# Altium PCB NetworkModule.PcbDoc (part 2 of 3)
Units mm, origin at the board's own origin, x right, y up, seen from the top; angles counter-clockwise.
Board outline 20 x 35 mm, 6 copper layers (Top, GND, Inner3, Inner4, PWR, Bottom), stack 0.74 mm thick; 111 components, 126 nets, 545 pads, 464 vias.
Unrouted connection lines stored in the file: 214.
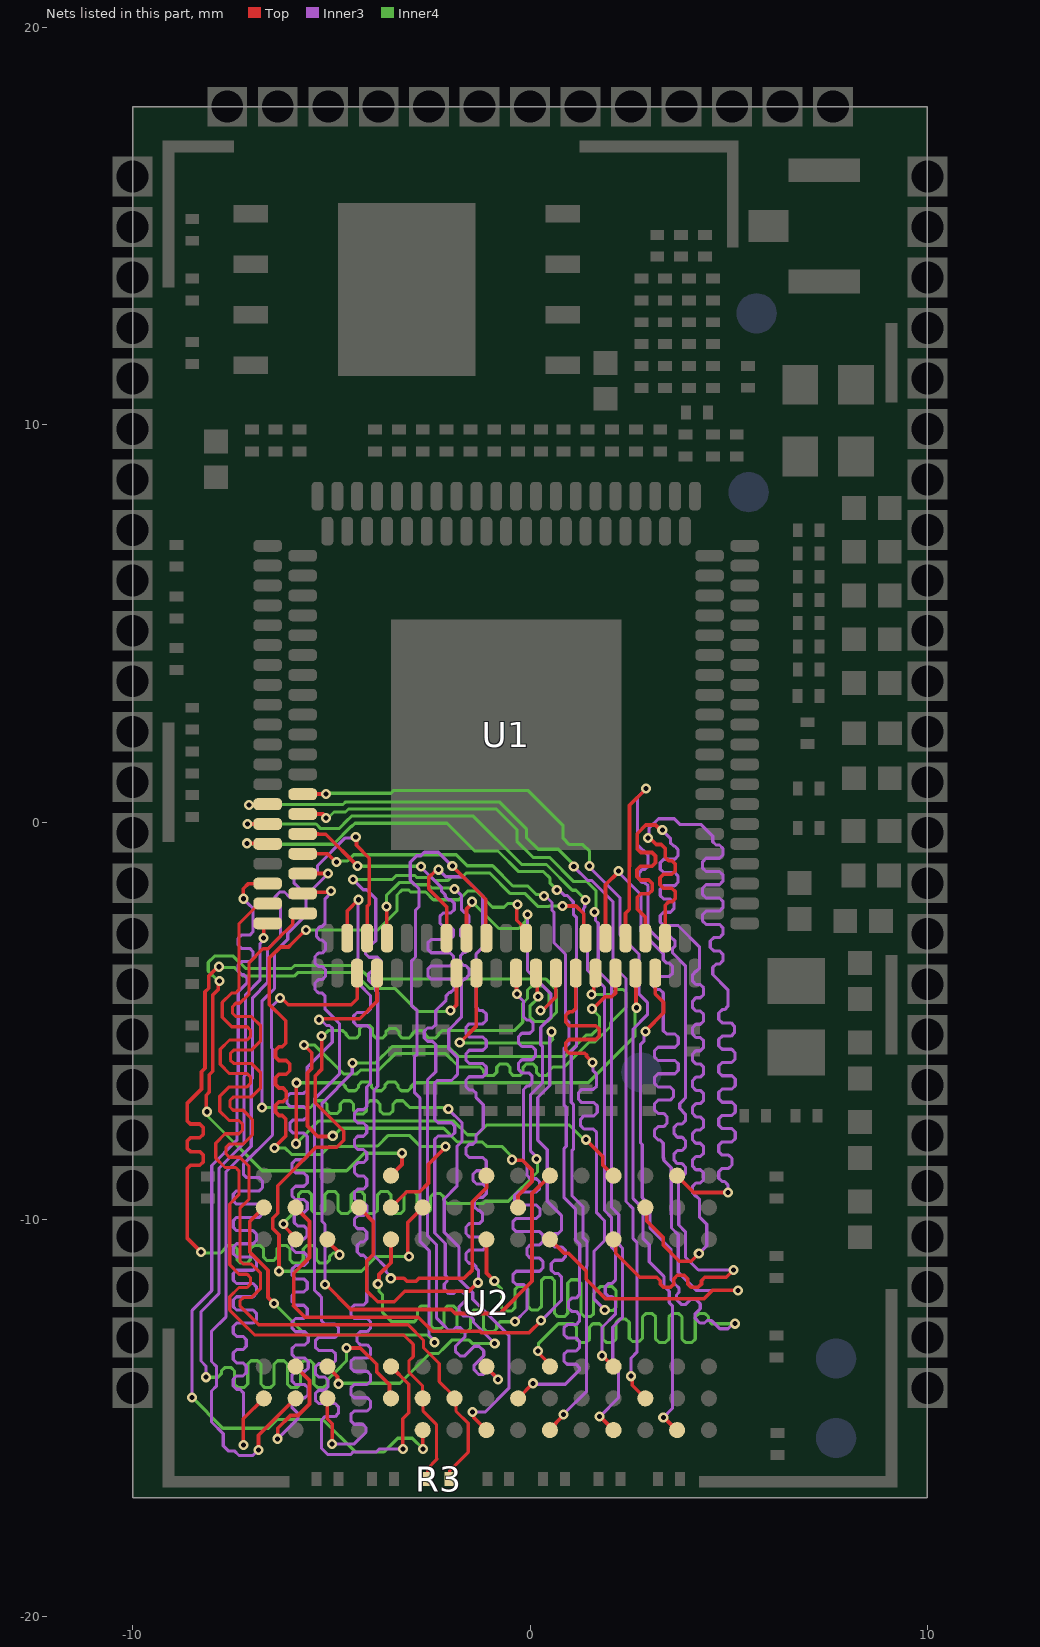
[diagram p6: the nets of this part, all layers, seen from the top]

## Via types
v1: diameter 0.254, hole 0.127, Top to Bottom, tented both sides, 398 vias
v2: diameter 0.254, hole 0.102, Top to Bottom, tented both sides, 66 vias

## Nets (pads, with @x,y where several pads share a name; then routed paths per layer and width w, separated by ;. In a path a pad name is that pad's centre, name@x,y a point inside that pad or via, vN(x,y) a via of type N, cw(c..) or ccw(c..) an arc to the next point about the centre after c; other vN are vias at no path point) (continued)
DDR_A4: U1.82 U2.N8 | length 23.3
  Top w0.092: U2.N8@-5.105,-14.529 -5.1,-14.534 -5.1,-15.018 -4.978,-15.139 v1(-4.978,-15.646) ; U1.82@-4.6,-2.92 -4.6,-2.238 v1@-4.32,-1.958
  Inner3 w0.079: v1(-4.978,-15.646) -4.42,-15.646 -4.166,-15.392 -4.126,-15.353 -4.126,-15.235 -4.209,-15.152 -4.426,-15.152 -4.509,-15.069 -4.509,-14.903 -4.426,-14.819 -4.099,-14.819 -4.016,-14.736 -4.016,-14.57 -4.099,-14.487 -4.426,-14.487 -4.509,-14.403 -4.509,-14.237 -4.426,-14.154 -4.099,-14.154 -4.016,-14.071 -4.016,-13.904 -4.099,-13.821 -4.426,-13.821 -4.509,-13.738 -4.509,-13.571 -4.426,-13.488 -4.099,-13.488 -4.016,-13.405 -4.016,-13.239 -4.099,-13.155 -4.272,-13.155 -4.355,-13.072 -4.355,-12.906 -4.272,-12.823 -4.099,-12.823 -4.016,-12.74 -4.016,-12.573 -4.099,-12.49 -4.426,-12.49 -4.509,-12.407 -4.509,-12.24 -4.426,-12.157 -4.191,-12.157 -4.108,-12.074 -4.108,-11.963 -4.108,-11.024 -4.108,-10.984 -4.191,-10.901 -4.264,-10.901 -4.348,-10.818 -4.348,-10.651 -4.264,-10.568 -4.191,-10.568 -4.108,-10.485 -4.108,-10.319 -4.191,-10.235 -4.334,-10.235 -4.417,-10.152 -4.417,-9.986 -4.334,-9.903 -4.191,-9.903 -4.108,-9.819 -4.108,-9.653 -4.191,-9.57 -4.334,-9.57 -4.417,-9.487 -4.417,-9.32 -4.334,-9.237 -4.191,-9.237 -4.108,-9.154 -4.108,-8.988 -4.191,-8.904 -4.334,-8.904 -4.417,-8.821 -4.417,-8.655 -4.334,-8.572 -4.191,-8.572 -4.108,-8.488 -4.108,-8.322 -4.191,-8.239 -4.334,-8.239 -4.417,-8.156 -4.417,-7.989 -4.334,-7.906 -4.191,-7.906 -4.108,-7.823 -4.108,-7.656 -4.191,-7.573 -4.334,-7.573 -4.417,-7.49 -4.417,-7.324 -4.334,-7.24 -4.191,-7.24 -4.108,-7.157 -4.108,-6.668 -4.013,-6.573 -4.013,-6.462 -4.013,-5.914 -4.013,-5.209 -4.096,-5.126 -4.353,-5.126 -4.436,-5.043 -4.436,-4.876 -4.353,-4.793 -4.096,-4.793 -4.013,-4.71 -4.013,-4.37 -4.289,-4.094 -4.294,-4.089 -4.331,-4.052 -4.331,-2.159 -4.331,-1.969 v1(-4.318,-1.956)
DDR_A5: U1.93 U2.N3 | length 22.8
  Top w0.092: v1(-8.277,-10.82) -8.629,-10.468 -8.629,-9.119 -8.629,-8.726 -8.542,-8.64 -8.312,-8.64 -8.226,-8.553 -8.226,-8.38 -8.312,-8.293 -8.542,-8.293 -8.629,-8.207 -8.629,-8.033 -8.542,-7.947 -8.312,-7.947 -8.226,-7.86 -8.226,-7.687 -8.312,-7.601 -8.542,-7.601 -8.629,-7.514 -8.629,-7.341 -8.629,-7.082 -8.266,-6.719 -8.266,-6.283 -8.177,-6.194 -8.177,-4.273 -8.087,-4.183 -8.087,-3.875 -7.853,-3.642 v1(-7.828,-3.642) ; U2.N3@-5.082,-10.49 -5.082,-10.56 -4.796,-10.847 v1(-4.796,-10.889) ; v1(-1.997,-4.748) -1.993,-4.748 -1.85,-4.605 U1.93@-1.85,-3.8
  Inner4 w0.078: v1(-8.277,-10.82) -8.251,-10.846 -7.823,-10.846 -7.784,-10.846 -7.701,-10.763 -7.701,-10.743 -7.618,-10.66 -7.452,-10.66 -7.368,-10.743 -7.368,-11.017 -7.285,-11.1 -7.119,-11.1 -7.036,-11.017 -7.036,-10.743 -6.953,-10.66 -6.787,-10.66 -6.704,-10.743 -6.704,-10.952 -6.621,-11.035 -6.454,-11.035 -6.371,-10.952 -6.371,-10.743 -6.288,-10.66 -6.122,-10.66 -6.039,-10.743 -6.039,-11.017 -5.956,-11.1 -5.79,-11.1 -5.707,-11.017 -5.707,-10.743 -5.623,-10.66 -5.457,-10.66 -5.374,-10.743 -5.374,-11.017 -5.291,-11.1 -5.125,-11.1 -5.042,-11.017 -5.042,-10.929 -4.959,-10.846 -4.851,-10.846 -4.839,-10.846 v1(-4.796,-10.889) ; v1(-7.828,-3.642) -7.812,-3.658 -7.439,-3.658 -7.22,-3.877 -5.937,-3.877 -5.849,-3.789 -4.436,-3.789 -4.039,-4.186 -3.406,-4.186 -2.829,-4.764 -2.013,-4.764 v1(-1.997,-4.748)
DDR_A6: U1.86 U2.N7 | length 22.8
  Top w0.092: U2.N7@-5.095,-13.706 -4.847,-13.955 -4.847,-14.104 v1(-4.816,-14.135) ; v1(-3.615,-2.125) -3.607,-2.133 -3.607,-2.913 U1.86@-3.6,-2.92
  Inner3 w0.079: v1(-1.902,-1.687) -1.885,-1.687 -1.727,-1.845 -1.727,-1.956 -1.727,-2.196 -1.644,-2.279 -1.621,-2.279 -1.538,-2.362 -1.538,-2.529 -1.621,-2.612 -1.667,-2.612 -1.75,-2.695 -1.75,-2.861 -1.667,-2.945 -1.621,-2.945 -1.538,-3.028 -1.538,-3.194 -1.621,-3.277 -1.667,-3.277 -1.75,-3.361 -1.75,-3.527 -1.667,-3.61 -1.621,-3.61 -1.538,-3.693 -1.538,-3.86 -1.621,-3.943 -1.644,-3.943 -1.727,-4.026 -1.727,-4.912 -1.997,-5.182 -2.046,-5.23 -2.046,-5.705 -1.83,-5.921 -1.83,-6.356 -1.976,-6.502 -2.338,-6.502 -2.399,-6.564 -2.399,-6.96 -2.399,-7.485 -2.316,-7.568 -1.977,-7.568 -1.894,-7.652 -1.894,-7.818 -1.977,-7.901 -2.316,-7.901 -2.399,-7.984 -2.399,-8.357 -2.399,-10.34 -2.133,-10.606 -2.133,-11.404 -2.105,-11.431 -2.092,-11.445 -2.092,-11.562 -2.16,-11.63 -2.16,-11.748 -2.042,-11.866 -1.924,-11.866 -1.856,-11.798 -1.739,-11.798 -1.621,-11.915 -1.621,-12.033 -1.785,-12.197 -1.785,-12.315 -1.668,-12.432 -1.506,-12.432 -1.422,-12.515 -1.422,-12.589 -1.395,-12.617 v1(-0.889,-13.123)
  Inner4 w0.078: v1(-4.816,-14.135) -4.803,-14.122 -3.272,-14.122 -2.524,-13.374 -2.302,-13.374 -2.144,-13.216 -2.144,-13.213 -1.961,-13.03 -1.545,-13.03 -1.457,-13.118 -0.894,-13.118 v1(-0.889,-13.123) ; v1(-3.615,-2.125) -3.615,-1.85 -3.291,-1.526 -2.968,-1.526 -2.915,-1.579 -2.554,-1.579 -2.468,-1.665 -1.924,-1.665 v1(-1.902,-1.687)
DDR_A7: U1.95 U2.P2 | length 22.6
  Top w0.092: -5.951,-12.174 -5.663,-12.462 -2.81,-12.462 -2.456,-12.816 -1.254,-12.816 -1.222,-12.848 -0.021,-12.848 v1(0.279,-12.548) ; -5.944,-12.167 -5.944,-11.352 -5.549,-10.957 -5.549,-10.051 U2.P2@-5.9,-9.7 ; v1(-1.768,-5.552) -1.35,-5.135 U1.95@-1.35,-3.8
  Inner3 w0.079: v1(0.279,-12.548) 0.787,-12.04 0.787,-11.481 0.787,-11.441 0.704,-11.358 0.617,-11.358 0.533,-11.275 0.533,-11.109 0.617,-11.025 0.807,-11.025 0.89,-10.942 0.89,-10.776 0.807,-10.693 0.617,-10.693 0.533,-10.609 0.533,-10.443 0.617,-10.36 0.704,-10.36 0.787,-10.277 0.787,-10.058 0.787,-9.898 0.433,-9.544 0.433,-8.243 0.194,-8.004 0.194,-6.931 0.496,-6.629 0.496,-5.388 0.503,-5.381 0.503,-5.311 v1(0.536,-5.277)
  Inner4 w0.078: v1(-1.768,-5.552) -1.757,-5.563 0.483,-5.563 0.576,-5.469 0.57,-5.463 0.57,-5.311 v1(0.536,-5.277)
DDR_A8: U1.84 U2.P8 | length 23.6
  Top w0.092: v1(-6.833,-15.799) -6.833,-15.433 -5.918,-14.518 U2.P8@-5.918,-14.478 ; v1(-4.386,-0.377) -4.366,-0.396 -4.366,-0.587 -4.043,-0.91 -4.043,-2.07 -4.1,-2.127 U1.84@-4.1,-2.92
  Inner3 w0.079: v1(-6.833,-15.799) -6.974,-15.94 -7.325,-15.94 -7.44,-15.824 -7.595,-15.824 -7.72,-15.699 -7.72,-15.392 -8.015,-15.097 -8.015,-14.316 -7.885,-14.187 -7.885,-13.703 -8.015,-13.573 -8.015,-12.812 -7.648,-12.445 -7.648,-8.793 -7.016,-8.161 -7.016,-6.476 -6.98,-6.44 -6.98,-4.418 -6.61,-4.048 -6.61,-3.208 -6.277,-2.875 -6.277,-2.308 -6.277,-2.134 -6.414,-1.997 -6.414,-1.88 -6.297,-1.762 -6.179,-1.762 -6.049,-1.892 -5.932,-1.892 -5.814,-1.774 -5.814,-1.657 -5.944,-1.527 -5.944,-1.409 -5.826,-1.291 -5.709,-1.291 -5.604,-1.396 -5.486,-1.396 -5.436,-1.346 -5.348,-1.259 -5.348,-1.101 -4.646,-0.399 -4.408,-0.399 v1(-4.386,-0.377)
DDR_A9: U1.94 U2.P3 | length 22.4
  Top w0.092: v1(-6.199,-10.116) -6.199,-10.158 -5.918,-10.439 U2.P3@-5.918,-10.49 ; U1.94@-1.6,-2.92 -1.6,-2.191 -1.459,-2.05 v1(-1.459,-2.007)
  Inner3 w0.079: v1(-0.062,-2.331) -0.062,-3.738 0.531,-4.332 0.531,-4.674 0.531,-4.903 0.268,-5.166 0.268,-5.609 0.316,-5.656 0.316,-6.554 0.014,-6.856 0.014,-8.282 0.165,-8.433 v1(0.165,-8.481)
  Inner4 w0.078: v1(-6.199,-10.116) -6.199,-10.086 -5.869,-9.755 -5.829,-9.716 -5.829,-9.375 -5.746,-9.292 -5.58,-9.292 -5.497,-9.375 -5.497,-9.766 -5.414,-9.849 -5.248,-9.849 -5.165,-9.766 -5.165,-9.375 -5.081,-9.292 -4.915,-9.292 -4.832,-9.375 -4.832,-9.766 -4.749,-9.849 -4.583,-9.849 -4.5,-9.766 -4.5,-9.375 -4.417,-9.292 -4.25,-9.292 -4.167,-9.375 -4.167,-9.766 -4.084,-9.849 -3.918,-9.849 -3.835,-9.766 -3.835,-9.375 -3.752,-9.292 -3.586,-9.292 -3.503,-9.375 -3.503,-9.766 -3.419,-9.849 -3.253,-9.849 -3.17,-9.766 -3.17,-9.375 -3.087,-9.292 -2.921,-9.292 -2.838,-9.375 -2.838,-9.766 -2.755,-9.849 -2.588,-9.849 -2.505,-9.766 -2.505,-9.431 -2.422,-9.348 -2.256,-9.348 -2.173,-9.431 -2.173,-9.512 -2.09,-9.595 -1.742,-9.595 -1.171,-9.595 -1.118,-9.542 -0.547,-9.542 0.188,-8.806 0.188,-8.504 v1(0.165,-8.481) ; v1(-1.459,-2.007) -0.785,-2.681 -0.288,-2.681 -0.095,-2.488 -0.095,-2.364 v1(-0.062,-2.331)
DDR_A10: U1.92 U2.M2 | length 23.8
  Top w0.092: U2.M2@-4.216,-9.728 -4.216,-9.784 -3.949,-10.051 -3.949,-10.891 -4.106,-11.047 -4.106,-11.802 -3.834,-12.074 -3.417,-12.074 -3.177,-11.833 -3.15,-11.806 -1.805,-11.806 -1.536,-11.806 -1.322,-11.592 v1(-1.31,-11.592) ; v1(-2.3,-1.2) -2.344,-1.2 -2.471,-1.327 -2.483,-1.327 -2.548,-1.392 -2.548,-1.683 -2.1,-2.131 U1.92@-2.1,-2.92
  Inner3 w0.079: v1(-2.3,-1.2) -2.123,-1.377 -1.678,-1.377 -1.191,-1.863 -1.191,-3.151 -1.358,-3.317 -1.358,-4.623 -1.358,-4.662 -1.274,-4.745 -1.187,-4.745 -1.104,-4.829 -1.104,-4.995 -1.187,-5.078 -1.528,-5.078 -1.612,-5.161 -1.612,-5.328 -1.528,-5.411 -1.187,-5.411 -1.104,-5.494 -1.104,-5.661 -1.187,-5.744 -1.528,-5.744 -1.612,-5.827 -1.612,-5.993 -1.528,-6.077 -1.187,-6.077 -1.104,-6.16 -1.104,-6.326 -1.187,-6.409 -1.528,-6.409 -1.612,-6.492 -1.612,-6.659 -1.528,-6.742 -1.441,-6.742 -1.358,-6.825 -1.358,-6.934 -1.177,-7.115 -1.177,-7.698 -1.334,-7.855 -1.339,-7.855 -1.358,-7.874 -1.358,-8.026 -1.441,-8.109 -1.528,-8.109 -1.612,-8.192 -1.612,-8.359 -1.528,-8.442 -1.187,-8.442 -1.104,-8.525 -1.104,-8.692 -1.187,-8.775 -1.349,-8.775 -1.432,-8.858 -1.432,-9.024 -1.349,-9.108 -1.187,-9.108 -1.104,-9.191 -1.104,-9.357 -1.187,-9.44 -1.311,-9.44 -1.394,-9.524 -1.394,-9.69 -1.311,-9.773 -1.277,-9.773 -1.194,-9.856 -1.194,-10.023 -1.277,-10.106 -1.528,-10.106 -1.612,-10.189 -1.612,-10.355 -1.528,-10.439 -1.187,-10.439 -1.104,-10.522 -1.104,-10.688 -1.187,-10.771 -1.528,-10.771 -1.612,-10.855 -1.612,-11.021 -1.528,-11.104 -1.441,-11.104 -1.358,-11.187 -1.358,-11.227 -1.295,-11.29 -1.295,-11.576 v1(-1.31,-11.592)
DDR_A11: U1.85 U2.P7 | length 23
  Top w0.092: v1(-6.35,-15.519) -6.35,-15.254 -6.03,-14.934 -5.838,-14.934 -5.549,-14.645 -5.549,-14.051 -5.918,-13.682 U2.P7@-5.918,-13.665 ; v1(-5.315,-4.975) -5.288,-4.948 -4.288,-4.948 -3.85,-4.51 U1.85@-3.85,-3.8
  Inner3 w0.079: v1(-6.35,-15.519) -5.893,-15.062 -5.836,-15.006 -5.836,-14.888 -5.986,-14.739 -5.986,-14.572 -5.903,-14.489 -5.664,-14.489 -5.581,-14.406 -5.581,-14.24 -5.664,-14.156 -5.903,-14.156 -5.986,-14.073 -5.986,-13.907 -5.903,-13.824 -5.664,-13.824 -5.581,-13.74 -5.581,-13.574 -5.664,-13.491 -5.903,-13.491 -5.986,-13.408 -5.986,-13.241 -5.903,-13.158 -5.664,-13.158 -5.581,-13.075 -5.581,-12.908 -5.664,-12.825 -5.903,-12.825 -5.986,-12.742 -5.986,-12.576 -5.903,-12.493 -5.69,-12.493 -5.607,-12.409 -5.607,-12.243 -5.69,-12.16 -5.903,-12.16 -5.986,-12.077 -5.986,-11.91 -5.903,-11.827 -5.69,-11.827 -5.607,-11.744 -5.607,-11.577 -5.69,-11.494 -5.903,-11.494 -5.986,-11.411 -5.986,-11.245 -5.903,-11.161 -5.69,-11.161 -5.607,-11.078 -5.607,-10.912 -5.69,-10.829 -5.903,-10.829 -5.986,-10.745 -5.986,-10.579 -5.903,-10.496 -5.69,-10.496 -5.607,-10.413 -5.607,-10.246 -5.69,-10.163 -5.851,-10.163 -5.934,-10.08 -5.934,-9.913 -5.851,-9.83 -5.69,-9.83 -5.607,-9.747 -5.607,-9.581 -5.69,-9.498 -5.903,-9.498 -5.986,-9.414 -5.986,-9.248 -5.903,-9.165 -5.69,-9.165 -5.607,-9.082 -5.607,-8.915 -5.69,-8.832 -5.903,-8.832 -5.986,-8.749 -5.986,-8.582 -5.903,-8.499 -5.69,-8.499 -5.607,-8.416 -5.607,-8.207 -5.607,-7.95 -5.607,-7.911 -5.69,-7.828 -5.961,-7.828 -6.045,-7.744 -6.045,-7.578 -5.961,-7.495 -5.69,-7.495 -5.607,-7.412 -5.607,-7.245 -5.69,-7.162 -6.031,-7.162 -6.114,-7.079 -6.114,-6.912 -6.031,-6.829 -5.69,-6.829 -5.607,-6.746 -5.607,-6.172 -5.605,-6.174 -4.977,-5.546 -4.977,-5.189 -5.046,-5.12 -5.122,-5.12 -5.267,-4.975 v1(-5.315,-4.975)
DDR_A12: U1.96 U2.R2 | length 23.3
  Top w0.092: U2.R2@-6.706,-9.703 -6.706,-9.706 -7.051,-10.051 -7.051,-10.818 -6.592,-11.278 -6.592,-11.962 v1(-6.438,-12.116) ; v1(-1.956,-1.109) -1.118,-1.947 -1.118,-2.902 U1.96@-1.1,-2.92
  Inner3 w0.079: v1(-2.406,-13.091) -2.406,-13.044 -2.541,-12.908 -2.541,-11.476 -2.535,-11.47 -2.535,-10.79 -2.772,-10.553 -2.772,-6.941 -2.91,-6.803 -2.91,-5.911 -2.843,-5.844 -2.843,-4.75 -2.986,-4.607 -2.986,-3.502 -2.882,-3.398 -2.882,-2.22 -2.794,-2.133 -2.794,-1.682 -3.015,-1.461 -3.015,-1.011 -2.854,-0.85 -2.747,-0.85 -2.658,-0.761 -2.306,-0.761 -1.958,-1.109 v1(-1.956,-1.109)
  Inner4 w0.078: v1(-6.438,-12.116) -5.647,-12.907 -2.59,-12.907 v1(-2.406,-13.091)
DDR_A13: U1.83 U2.R8 | length 23
  Top w0.092: v1(-7.214,-15.672) -7.214,-15.014 -6.703,-14.503 U2.R8@-6.68,-14.503 ; v1(-6.291,-4.432) -6.247,-4.432 -6.082,-4.597 -4.497,-4.597 -4.35,-4.45 U1.83@-4.35,-3.8
  Inner3 w0.079: v1(-7.214,-15.672) -7.214,-15.062 -7.214,-14.357 -7.297,-14.274 -7.384,-14.274 -7.468,-14.191 -7.468,-14.024 -7.384,-13.941 -7.223,-13.941 -7.14,-13.858 -7.14,-13.691 -7.223,-13.608 -7.384,-13.608 -7.468,-13.525 -7.468,-13.359 -7.384,-13.275 -7.223,-13.275 -7.14,-13.192 -7.14,-13.026 -7.223,-12.943 -7.384,-12.943 -7.468,-12.859 -7.468,-12.693 -7.384,-12.61 -6.969,-12.61 -6.886,-12.527 -6.886,-12.36 -6.969,-12.277 -7.384,-12.277 -7.468,-12.194 -7.468,-12.028 -7.384,-11.944 -6.969,-11.944 -6.886,-11.861 -6.886,-11.695 -6.969,-11.612 -7.384,-11.612 -7.468,-11.528 -7.468,-11.362 -7.384,-11.279 -6.969,-11.279 -6.886,-11.196 -6.886,-11.029 -6.969,-10.946 -7.384,-10.946 -7.468,-10.863 -7.468,-10.696 -7.384,-10.613 -6.969,-10.613 -6.886,-10.53 -6.886,-10.364 -6.969,-10.28 -7.384,-10.28 -7.468,-10.197 -7.468,-10.031 -7.384,-9.948 -6.814,-9.948 -6.731,-9.864 -6.731,-9.698 -6.814,-9.615 -7.384,-9.615 -7.468,-9.532 -7.468,-9.365 -7.384,-9.282 -6.814,-9.282 -6.731,-9.199 -6.731,-9.033 -6.814,-8.949 -7.13,-8.949 -7.214,-8.866 -7.214,-8.661 -7.214,-8.614 -6.48,-7.88 -6.48,-5.711 -6.505,-5.686 -6.505,-4.646 v1(-6.291,-4.432)
DDR_BA0: U1.100 U2.L2 | length 21.7
  Top w0.092: v1(-6.427,-8.206) -6.427,-8.179 -6.149,-7.902 -6.149,-7.518 -6.149,-7.472 -6.236,-7.386 -6.317,-7.386 -6.403,-7.299 -6.403,-7.126 -6.317,-7.039 -6.218,-7.039 -6.131,-6.953 -6.131,-6.78 -6.218,-6.693 -6.317,-6.693 -6.403,-6.606 -6.403,-6.433 -6.317,-6.347 -6.135,-6.347 -6.049,-6.26 -6.049,-6.087 -6.135,-6 -6.317,-6 -6.403,-5.914 -6.403,-5.741 -6.317,-5.654 -6.236,-5.654 -6.149,-5.567 -6.149,-5.182 -6.149,-5.001 -6.566,-4.584 -6.566,-3.429 -6.28,-3.144 -6.078,-3.144 -5.982,-3.047 -5.821,-2.886 -5.653,-2.718 v1(-5.639,-2.718) ; U2.L2@-3.48,-9.68 -3.106,-9.306 -2.777,-9.306 -2.553,-9.082 -2.553,-8.614 -2.126,-8.187 v1(-2.126,-8.169) ; v1(-0.314,-2.08) -0.337,-2.103 -0.337,-2.473 -0.1,-2.71 U1.100@-0.1,-2.92
  Inner4 w0.078: v1(-6.427,-8.206) -6.159,-8.206 -6.002,-8.363 -5.251,-8.363 -5.051,-8.163 -4.447,-8.163 -4.437,-8.153 -3.834,-8.153 -3.566,-7.886 -3.039,-7.886 -2.762,-8.163 -2.132,-8.163 v1(-2.126,-8.169) ; v1(-5.639,-2.718) -3.829,-2.718 -3.347,-2.236 -3.347,-1.837 -3.217,-1.706 -3.062,-1.706 -3.009,-1.759 -2.629,-1.759 -2.433,-1.955 -1.791,-1.955 -1.575,-1.739 -1.348,-1.739 -1.135,-1.952 -1.135,-1.956 -0.946,-2.145 -0.655,-2.145 -0.561,-2.051 -0.342,-2.051 v1(-0.314,-2.08)
DDR_BA1: U1.99 U2.L3 | length 22.8
  Top w0.092: v1(-3.831,-11.623) -3.8,-11.592 -3.8,-11.387 -3.5,-11.087 U2.L3@-3.5,-10.51 ; U1.99@-0.35,-3.8 -0.34,-3.81 -0.34,-4.319 v1(-0.33,-4.329)
  Inner3 w0.079: v1(-0.381,-12.573) -0.075,-12.267 -0.075,-11.76 -0.075,-11.721 -0.158,-11.638 -0.348,-11.638 -0.431,-11.554 -0.431,-11.388 -0.348,-11.305 0.241,-11.305 0.324,-11.222 0.324,-11.055 0.241,-10.972 0.008,-10.972 -0.075,-10.889 -0.075,-10.722 0.008,-10.639 0.241,-10.639 0.324,-10.556 0.324,-10.39 0.241,-10.306 -0.348,-10.306 -0.431,-10.223 -0.431,-10.057 -0.348,-9.974 0.164,-9.974 0.247,-9.891 0.247,-9.724 0.164,-9.641 -0.304,-9.641 -0.387,-9.558 -0.387,-9.391 -0.304,-9.308 0.157,-9.308 0.24,-9.225 0.24,-9.059 0.157,-8.975 0.008,-8.975 -0.075,-8.892 -0.075,-8.635 -0.166,-8.544 -0.166,-6.729 -0.083,-6.646 -0.031,-6.646 0.052,-6.563 0.052,-6.396 -0.031,-6.313 -0.205,-6.313 -0.288,-6.23 -0.288,-6.064 -0.205,-5.98 0.052,-5.98 0.135,-5.897 0.135,-5.731 0.052,-5.648 -0.205,-5.648 -0.288,-5.564 -0.288,-5.398 -0.205,-5.315 -0.006,-5.315 0.077,-5.232 0.077,-5.065 -0.006,-4.982 -0.083,-4.982 -0.166,-4.899 -0.166,-4.851 -0.166,-4.511 -0.33,-4.347 v1(-0.33,-4.329)
  Inner4 w0.078: v1(-3.831,-11.623) -3.797,-11.657 -3.797,-11.813 -3.708,-11.902 -3.708,-12.344 -3.692,-12.361 -3.48,-12.573 -2.914,-12.573 -2.831,-12.49 -2.831,-12.266 -2.748,-12.183 -2.582,-12.183 -2.498,-12.266 -2.498,-12.669 -2.415,-12.752 -2.249,-12.752 -2.166,-12.669 -2.166,-12.266 -2.083,-12.183 -1.917,-12.183 -1.834,-12.266 -1.834,-12.744 -1.751,-12.827 -1.584,-12.827 -1.501,-12.744 -1.501,-12.365 -1.418,-12.282 -1.252,-12.282 -1.169,-12.365 -1.169,-12.744 -1.086,-12.827 -0.92,-12.827 -0.837,-12.744 -0.837,-12.656 -0.753,-12.573 -0.714,-12.573 v1(-0.381,-12.573)
DDR_BA2: U1.101 U2.L1 | length 22.3
  Top w0.092: v1(-8.128,-7.29) -8.15,-7.268 -8.15,-6.877 -8.069,-6.796 -8.069,-6.359 -7.983,-6.274 -7.983,-4.354 -7.843,-4.213 -7.843,-4.028 v1(-7.812,-3.997) ; U2.L1@-3.48,-8.89 -3.48,-8.88 -3.22,-8.62 v1(-3.22,-8.333) ; U1.101@0.15,-3.8 0.178,-3.828 0.178,-4.366 v1(0.205,-4.393)
  Inner4 w0.078: v1(-8.128,-7.29) -8.094,-7.323 -8.094,-7.393 -8.093,-7.394 -8.093,-7.422 -6.74,-8.774 -4.615,-8.774 -4.174,-8.333 v1(-3.22,-8.333) ; v1(-7.812,-3.997) -7.851,-3.997 -8.096,-3.753 -8.096,-3.531 -7.939,-3.374 -7.468,-3.374 -7.156,-3.686 -6,-3.686 -5.923,-3.609 -4.361,-3.609 -4.025,-3.945 0.393,-3.945 0.664,-4.216 0.664,-4.794 0.442,-5.015 0.111,-5.015 -0.005,-4.9 -0.005,-4.637 0.205,-4.426 v1(0.205,-4.393)
DDR_CAS: U1.75 U2.L7 | length 23.6
  Top w0.092: U1.75@-5.72,-1.8 -5.68,-1.76 -5.673,-1.766 -5.042,-1.766 v1(-5.011,-1.735) ; U2.L7@-3.509,-13.691 -3.051,-14.149 -3.051,-14.865 -3.2,-15.014 v1(-3.2,-15.773)
  Inner3 w0.079: v1(-5.011,-1.735) -5.011,-1.783 -5.156,-1.929 -5.156,-2.032 -5.156,-2.552 -5.239,-2.635 -5.288,-2.635 -5.371,-2.718 -5.371,-2.885 -5.288,-2.968 -5.231,-2.968 -5.148,-3.051 -5.148,-3.217 -5.231,-3.301 -5.327,-3.301 -5.41,-3.384 -5.41,-3.55 -5.327,-3.633 -5.231,-3.633 -5.148,-3.716 -5.148,-3.883 -5.231,-3.966 -5.327,-3.966 -5.41,-4.049 -5.41,-4.216 -5.327,-4.299 -5.239,-4.299 -5.156,-4.382 -5.156,-4.712 -4.864,-5.004 -4.797,-5.071 -4.797,-6.346 -5.426,-6.976 -5.426,-11.776 -5.293,-11.91 -5.246,-11.956 -5.246,-12.344 -5.246,-12.55 -5.163,-12.633 -4.905,-12.633 -4.822,-12.716 -4.822,-12.883 -4.905,-12.966 -5.318,-12.966 -5.401,-13.049 -5.401,-13.215 -5.318,-13.299 -4.974,-13.299 -4.891,-13.382 -4.891,-13.548 -4.974,-13.631 -5.318,-13.631 -5.401,-13.715 -5.401,-13.881 -5.318,-13.964 -5.167,-13.964 -5.084,-14.047 -5.084,-14.214 -5.167,-14.297 -5.318,-14.297 -5.401,-14.38 -5.401,-14.546 -5.318,-14.63 -4.905,-14.63 -4.822,-14.713 -4.822,-14.879 -4.905,-14.962 -5.163,-14.962 -5.246,-15.046 -5.246,-15.418 -5.246,-15.757 -5.089,-15.914 -4.51,-15.914 -4.445,-15.85 -3.865,-15.85 -3.789,-15.773 v1(-3.2,-15.773)
DDR_CKE: U1.103 U2.K2 | length 21.7
  Top w0.092: v1(-6.317,-11.303) -6.317,-10.387 -6.349,-10.355 -6.477,-10.227 -6.477,-9.973 -6.349,-9.845 -6.349,-9.149 -5.386,-8.186 -4.867,-8.186 -4.69,-8.009 -4.69,-7.781 -5.406,-7.065 -5.406,-6.389 -5.245,-6.228 v1(-5.245,-5.385) ; v1(-3.042,-10.932) -3.073,-10.901 -3.073,-10.797 -3.073,-10.073 -2.769,-9.769 U2.K2@-2.769,-9.754 ; v1(0.263,-4.748) 0.304,-4.748 0.65,-4.402 U1.103@0.65,-3.8
  Inner4 w0.078: v1(-6.317,-11.303) -4.24,-11.303 -3.868,-10.931 -3.498,-10.931 ; v1(-5.245,-5.385) -5.217,-5.385 -5.08,-5.248 -4.708,-5.248 -4.625,-5.331 -4.625,-5.355 -4.542,-5.438 -4.376,-5.438 -4.293,-5.355 -4.293,-5.199 -4.21,-5.116 -4.044,-5.116 -3.961,-5.199 -3.961,-5.355 -3.877,-5.438 -3.711,-5.438 -3.628,-5.355 -3.628,-5.278 -3.545,-5.195 -3.379,-5.195 -3.296,-5.278 -3.296,-5.355 -3.213,-5.438 -3.046,-5.438 -2.963,-5.355 -2.963,-5.331 -2.88,-5.248 -2.714,-5.248 -2.631,-5.331 -2.631,-5.355 -2.548,-5.438 -2.382,-5.438 -2.299,-5.355 -2.299,-5.331 -2.215,-5.248 -1.93,-5.248 -0.397,-5.248 -0.185,-5.036 -0.185,-4.562 -0.063,-4.44 -0.063,-4.228 0.04,-4.125 0.318,-4.125 0.484,-4.291 0.484,-4.568 0.304,-4.748 v1(0.263,-4.748) ; -3.497,-10.932 v1(-3.042,-10.932)
DDR_CLK_N: R3.1 U1.76 U2.K8 | length 24.1
  Top w0.079: U1.76@-6.6,-2.05 -6.81,-2.05 -7.326,-2.566 -7.326,-3.537 -7.326,-4.22 -7.41,-4.303 -7.51,-4.303 -7.744,-4.537 -7.744,-4.917 -7.51,-5.151 -7.119,-5.151 -7.036,-5.234 -7.036,-5.4 -7.119,-5.484 -7.562,-5.484 -7.796,-5.718 -7.796,-6.097 -7.562,-6.331 -7.119,-6.331 -7.036,-6.414 -7.036,-6.581 -7.119,-6.664 -7.573,-6.664 -7.807,-6.898 -7.807,-7.278 -7.573,-7.511 -7.323,-7.511 -7.239,-7.595 -7.239,-7.761 -7.323,-7.845 -7.675,-7.845 -7.909,-8.078 -7.909,-8.458 -7.675,-8.692 -7.41,-8.692 -7.326,-8.775 -7.326,-8.89 -7.326,-9.381 -7.557,-9.611 -7.557,-9.881 -7.557,-11.145 -7.323,-11.378 -7.119,-11.378 -7.036,-11.462 -7.036,-11.628 -7.119,-11.712 -7.323,-11.712 -7.557,-11.945 -7.557,-12.28 -7.239,-12.598 -6.931,-12.906 -6.617,-12.906 -3.175,-12.906 -2.938,-13.143 -2.938,-13.451 -3.044,-13.557 -3.044,-13.843 -2.709,-14.178 -2.709,-14.491 U2.K8@-2.7,-14.5 U2.K8@-2.691,-14.509 ; U2.K8@-2.692,-14.478 -2.691,-14.479 U2.K8@-2.691,-14.509 ; R3.1@-2.575,-16.6 -2.575,-16.583 -2.575,-16.266 -2.36,-16.051 -2.337,-16.027 -2.356,-16.009 -2.356,-15.157 -2.691,-14.822 U2.K8@-2.691,-14.509
DDR_CLK_P: R3.2 U1.77 U2.J8 | length 24.2
  Top w0.079: U1.77@-5.72,-2.3 -5.865,-2.3 -5.971,-2.405 -5.971,-2.569 -6.369,-2.967 -6.592,-3.19 -6.722,-3.19 -7.069,-3.537 -7.069,-4.327 -7.303,-4.56 -7.403,-4.56 -7.487,-4.644 -7.487,-4.81 -7.403,-4.894 -7.013,-4.894 -6.779,-5.127 -6.779,-5.507 -7.013,-5.741 -7.456,-5.741 -7.539,-5.824 -7.539,-5.991 -7.456,-6.074 -7.013,-6.074 -6.779,-6.308 -6.779,-6.687 -7.013,-6.921 -7.467,-6.921 -7.55,-7.004 -7.55,-7.171 -7.467,-7.254 -7.216,-7.254 -6.982,-7.488 -6.982,-7.868 -7.216,-8.102 -7.568,-8.102 -7.652,-8.185 -7.652,-8.352 -7.568,-8.435 -7.303,-8.435 -7.069,-8.669 -7.069,-8.89 -7.069,-9.487 -7.3,-9.718 -7.3,-9.881 -7.3,-11.038 -7.217,-11.121 -7.013,-11.121 -6.779,-11.355 -6.779,-11.735 -7.013,-11.969 -7.217,-11.969 -7.3,-12.052 -7.3,-12.174 -6.876,-12.598 -6.825,-12.649 -6.617,-12.649 -3.175,-12.649 -3.069,-12.649 -2.681,-13.037 -2.681,-13.23 -2.286,-13.625 -2.286,-14.08 U2.J8@-1.926,-14.44 ; R3.2@-2.025,-16.6 -2.025,-16.325 -1.556,-15.856 -1.556,-15.129 -1.863,-14.822 -1.863,-14.537 U2.J8@-1.9,-14.5
DDR_CS: U1.78 U2.L8 | length 22.2
  Top w0.092: v1(-6.703,-2.922) -6.703,-2.649 -6.604,-2.55 U1.78@-6.6,-2.55 ; v1(-4.623,-13.233) -4.27,-13.233 -3.857,-13.646 -3.857,-13.839 -3.538,-14.158 -3.538,-14.42 U2.L8@-3.505,-14.453
  Inner3 w0.079: v1(-8.153,-13.97) -8.153,-13.69 -8.28,-13.563 -8.28,-12.319 -7.828,-11.867 -7.828,-8.718 -7.196,-8.086 -7.196,-6.402 -7.16,-6.366 -7.16,-4.343 -6.791,-3.973 -6.791,-3.057 -6.703,-2.969 v1(-6.703,-2.922)
  Inner4 w0.078: v1(-8.153,-13.97) -7.89,-13.97 -7.851,-13.97 -7.768,-13.887 -7.768,-13.813 -7.685,-13.73 -7.519,-13.73 -7.436,-13.813 -7.436,-14.141 -7.353,-14.224 -7.186,-14.224 -7.103,-14.141 -7.103,-13.637 -7.02,-13.554 -6.854,-13.554 -6.771,-13.637 -6.771,-14.141 -6.688,-14.224 -6.522,-14.224 -6.438,-14.141 -6.438,-13.637 -6.355,-13.554 -6.189,-13.554 -6.106,-13.637 -6.106,-14.141 -6.023,-14.224 -5.857,-14.224 -5.774,-14.141 -5.774,-13.637 -5.691,-13.554 -5.524,-13.554 -5.441,-13.637 -5.441,-14.141 -5.358,-14.224 -5.192,-14.224 -5.109,-14.141 -5.109,-14.05 -4.877,-13.818 -4.623,-13.564 v1(-4.623,-13.233)
DDR_D0: U1.71 U2.G8 | length 22.6
  Top w0.092: U1.71@-5.72,-0.8 -5.094,-0.8 -4.887,-1.007 v1(-4.875,-1.007) ; U2.G8@-0.3,-14.5 0.076,-14.124 v1(0.076,-14.122)
  Inner3 w0.079: v1@0.051,-14.097 v1(0.076,-14.122) 0.102,-14.148 0.889,-14.148 1.242,-13.795 1.242,-13.767 1.242,-13.727 1.159,-13.644 0.936,-13.644 0.852,-13.561 0.852,-13.395 0.936,-13.311 1.159,-13.311 1.242,-13.228 1.242,-13.062 1.159,-12.979 0.936,-12.979 0.852,-12.895 0.852,-12.729 0.936,-12.646 1.159,-12.646 1.242,-12.563 1.242,-12.396 1.159,-12.313 1.051,-12.313 0.968,-12.23 0.968,-12.064 1.051,-11.98 1.159,-11.98 1.242,-11.897 1.242,-11.43 1.242,-11.1 1.251,-11.092 1.251,-10.626 1.148,-10.524 1.148,-9.748 0.857,-9.456 0.857,-8.212 0.911,-8.158 0.911,-7.181 0.857,-7.127 0.857,-5.694 0.984,-5.566 0.984,-5.044 0.892,-4.951 0.892,-3.329 0.602,-3.04 0.602,-2.269 0.553,-2.22 0.553,-2.08 0.552,-2.024 0.39,-1.862 v1(0.353,-1.862)
  Inner4 w0.078: v1(-4.875,-1.007) -4.86,-1.007 -4.833,-0.98 -4.591,-0.98 -4.435,-0.825 -1.857,-0.825 -1.58,-1.102 -0.941,-1.102 -0.433,-1.609 -0.058,-1.609 0.162,-1.829 0.32,-1.829 v1(0.353,-1.862)
DDR_D1: U1.107 U2.G2 | length 21.8
  Top w0.092: v1(-5.688,-5.614) -5.496,-5.807 -5.496,-6.204 -5.6,-6.308 -5.6,-7.651 -5.34,-7.911 -4.98,-7.911 v1(-4.964,-7.895) ; v1(-0.458,-8.498) -0.446,-8.511 -0.193,-8.511 0.051,-8.755 0.051,-9.045 -0.305,-9.401 U2.G2@-0.305,-9.525 ; v1(1.549,-4.343) 1.549,-4.3 1.599,-4.25 1.599,-3.851 U1.107@1.65,-3.8
  Inner4 w0.078: v1(-5.688,-5.614) -5.416,-5.614 -4.694,-6.336 -4.36,-6.336 -4.263,-6.239 -3.803,-6.239 -3.393,-5.828 -2.125,-5.828 -1.787,-6.166 -1.626,-6.166 -1.254,-6.166 -1.171,-6.249 -1.171,-6.298 -1.088,-6.381 -0.922,-6.381 -0.839,-6.298 -0.839,-6.167 -0.755,-6.084 -0.589,-6.084 -0.506,-6.167 -0.506,-6.298 -0.423,-6.381 -0.257,-6.381 -0.174,-6.298 -0.174,-6.167 -0.091,-6.084 0.076,-6.084 0.159,-6.167 0.159,-6.298 0.242,-6.381 0.408,-6.381 0.491,-6.298 0.491,-6.249 0.574,-6.166 0.737,-6.166 0.865,-6.166 1.494,-5.537 1.631,-5.537 2.023,-5.144 2.023,-5.054 2.416,-4.661 2.416,-4.288 2.343,-4.215 2.154,-4.215 2.025,-4.343 v1(1.549,-4.343) ; v1(-4.964,-7.895) -4.942,-7.895 -4.752,-7.706 -2.173,-7.706 -1.829,-8.05 -1.201,-8.05 -1.09,-8.161 -0.712,-8.161 -0.492,-8.381 -0.492,-8.465 v1(-0.458,-8.498)
DDR_D2: U1.69 U2.H7 | length 22.7
  Top w0.092: U1.69@-5.72,-0.3 -5.716,-0.295 -5.334,-0.295 ; -5.334,-0.305 -5.14,-0.305 v1(-4.339,-1.107) ; U2.H7@-1.1,-13.7 -1.1,-13.717 -0.801,-14.015 v1(-0.801,-14.032)
  Inner3 w0.079: v1(-2.747,-1.122) -2.747,-1.132 -2.226,-1.653 -2.226,-1.744 -2.135,-1.835 -2.135,-1.874 -2.051,-1.957 -1.991,-1.957 -1.908,-2.041 -1.908,-2.207 -1.991,-2.29 -2.186,-2.29 -2.27,-2.373 -2.27,-2.54 -2.186,-2.623 -2.014,-2.623 -1.93,-2.706 -1.93,-2.872 -2.014,-2.956 -2.486,-2.956 -2.57,-3.039 -2.57,-3.205 -2.486,-3.288 -2.014,-3.288 -1.93,-3.372 -1.93,-3.538 -2.014,-3.621 -2.486,-3.621 -2.57,-3.704 -2.57,-3.871 -2.486,-3.954 -1.991,-3.954 -1.908,-4.037 -1.908,-4.204 -1.991,-4.287 -2.027,-4.287 -2.111,-4.37 -2.111,-4.482 -2.238,-4.609 -2.277,-4.648 -2.374,-4.745 -2.374,-4.902 -2.374,-5.1 -2.457,-5.183 -2.579,-5.183 -2.662,-5.267 -2.662,-5.433 -2.579,-5.516 -2.457,-5.516 -2.374,-5.599 -2.374,-5.639 -2.374,-6.283 -2.579,-6.489 -2.579,-10.414 -2.35,-10.644 -2.35,-12.484 -2.21,-12.624 -2.182,-12.652 -2.052,-12.782 -1.934,-12.782 -1.872,-12.72 -1.755,-12.72 -1.637,-12.837 -1.637,-12.955 -1.879,-13.197 -1.879,-13.314 -1.761,-13.432 -1.643,-13.432 -1.402,-13.19 -1.284,-13.19 -1.166,-13.308 -1.166,-13.426 -1.408,-13.667 -1.408,-13.785 -1.29,-13.902 -1.173,-13.902 -1.111,-13.841 -0.993,-13.841 -0.965,-13.868 v1(-0.801,-14.032)
  Inner4 w0.078: v1(-4.339,-1.107) -4.331,-1.114 -2.755,-1.114 v1(-2.747,-1.122)
DDR_D3: U1.105 U2.H3 | length 22.9
  Top w0.092: U2.H3@-1.1,-10.5 -1.095,-10.505 -1.095,-11.351 v1(-0.9,-11.545) ; U1.105@1.15,-3.8 1.15,-4.267 1.15,-4.691 1.063,-4.778 0.983,-4.778 0.896,-4.864 0.896,-5.037 0.983,-5.124 1.653,-5.124 1.74,-5.211 1.74,-5.384 1.653,-5.47 0.983,-5.47 0.896,-5.557 0.896,-5.73 0.983,-5.817 1.376,-5.817 1.422,-5.863 1.422,-5.895 1.571,-6.044 v1(1.571,-6.047)
  Inner3 w0.079: v1(1.571,-6.047) 1.584,-6.06 1.584,-6.258 1.626,-6.299 1.676,-6.35 1.676,-6.644 1.593,-6.728 1.301,-6.728 1.217,-6.811 1.217,-6.977 1.301,-7.06 1.609,-7.06 1.692,-7.144 1.692,-7.31 1.609,-7.393 1.355,-7.393 1.271,-7.476 1.271,-7.643 1.355,-7.726 1.593,-7.726 1.676,-7.809 1.676,-7.849 1.676,-9.833 1.873,-10.029 1.873,-10.534 1.611,-10.795 1.611,-12.006 v1(1.879,-12.274)
  Inner4 w0.078: v1(-0.9,-11.545) -0.9,-11.571 -0.787,-11.684 -0.714,-11.758 -0.714,-12.222 -0.631,-12.305 -0.464,-12.305 -0.381,-12.222 -0.381,-11.767 -0.298,-11.684 -0.132,-11.684 -0.049,-11.767 -0.049,-12.197 0.034,-12.28 0.2,-12.28 0.283,-12.197 0.283,-11.541 0.367,-11.458 0.533,-11.458 0.616,-11.541 0.616,-12.362 0.699,-12.445 0.865,-12.445 0.948,-12.362 0.948,-11.6 1.031,-11.517 1.198,-11.517 1.281,-11.6 1.281,-12.361 1.364,-12.444 1.53,-12.444 1.6,-12.374 1.6,-11.862 1.778,-11.684 2.057,-11.684 2.159,-11.786 2.159,-12.217 2.083,-12.294 1.905,-12.294 v1@1.88,-12.268 ; v1(1.879,-12.274) 1.913,-12.308 v1@1.97,-12.308
DDR_D4: U1.106 U2.H1 | length 23.1
  Top w0.092: v1(-3.505,-11.481) -3.174,-11.481 -3.097,-11.558 -2.87,-11.558 -2.793,-11.481 -1.662,-11.481 -1.451,-11.27 -1.451,-9.555 -1.092,-9.196 U2.H1@-1.092,-8.839 ; v1(0.821,-2.114) 1.153,-2.114 1.351,-2.311 1.351,-2.87 U1.106@1.4,-2.92
  Inner3 w0.079: v1@-4.445,-1.448 -4.445,-1.453 -4.196,-1.703 -4.11,-1.703 -3.883,-1.93 -3.883,-2.337 -3.883,-2.987 -3.966,-3.07 -4.054,-3.07 -4.137,-3.153 -4.137,-3.32 -4.054,-3.403 -3.84,-3.403 -3.756,-3.486 -3.756,-3.652 -3.84,-3.736 -3.976,-3.736 -4.06,-3.819 -4.06,-3.985 -3.976,-4.068 -3.966,-4.068 -3.883,-4.152 -3.883,-4.191 -3.883,-4.245 -3.833,-4.295 -3.833,-6.648 -3.928,-6.743 -3.928,-10.906 -3.63,-11.203 -3.63,-11.308 -3.505,-11.433 v1(-3.505,-11.481)
  Inner4 w0.078: v1@-4.42,-1.422 -4.4,-1.442 -3.461,-1.442 -3.366,-1.346 -2.893,-1.346 -2.84,-1.399 -2.479,-1.399 -2.411,-1.468 -2.061,-1.468 -1.97,-1.376 -1.701,-1.376 -1.606,-1.282 -1.015,-1.282 -0.494,-1.803 -0.12,-1.803 0.208,-2.13 0.467,-2.13 0.48,-2.116 0.818,-2.116 v1(0.821,-2.114)
  other v1: -4.456,-1.442
DDR_D5: U1.73 U2.H9 | length 23.3
  Top w0.092: U1.73@-5.72,-1.3 -5.715,-1.295 -5.08,-1.295 v1(-5.08,-1.298) ; v1(-1.449,-14.848) -1.417,-14.88 -1.417,-14.983 U2.H9@-1.1,-15.3
  Inner3 w0.079: v1(-6.748,-7.185) -6.748,-4.51 -6.43,-4.192 -6.43,-3.283 -6.097,-2.95 -6.097,-2.797 -5.635,-2.335 -5.635,-1.851 -5.083,-1.298 v1(-5.08,-1.298) ; v1(-2.057,-7.225) -1.713,-7.568 -1.713,-8.039 -1.84,-8.166 -1.84,-9.168 -2.157,-9.485 -2.157,-10.326 -1.792,-10.692 -1.792,-11.489 -1.441,-11.84 -1.441,-12.011 -0.533,-12.918 -0.533,-14.249 -1.132,-14.848 v1(-1.449,-14.848)
  Inner4 w0.078: v1(-6.748,-7.185) -5.563,-7.185 -5.523,-7.185 -5.44,-7.102 -5.44,-7.097 -5.357,-7.014 -5.191,-7.014 -5.108,-7.097 -5.108,-7.255 -5.025,-7.338 -4.859,-7.338 -4.776,-7.255 -4.776,-7.097 -4.692,-7.014 -4.526,-7.014 -4.443,-7.097 -4.443,-7.263 -4.36,-7.346 -4.194,-7.346 -4.111,-7.263 -4.111,-7.097 -4.028,-7.014 -3.861,-7.014 -3.778,-7.097 -3.778,-7.263 -3.695,-7.346 -3.529,-7.346 -3.446,-7.263 -3.446,-7.097 -3.363,-7.014 -3.197,-7.014 -3.114,-7.097 -3.114,-7.102 -3.03,-7.185 -2.464,-7.185 -2.191,-7.185 -2.185,-7.191 -2.091,-7.191 v1(-2.057,-7.225)
DDR_D6: U1.109 U2.F1 | length 23.2
  Top w0.092: v1(-5.158,-11.633) -5.144,-11.633 -4.509,-12.268 -1.98,-12.268 -1.882,-12.366 -0.758,-12.366 0.051,-11.557 0.051,-9.349 U2.F1@0.5,-8.9 ; v1(1.554,-4.699) 1.582,-4.699 1.883,-4.398 2.053,-4.398 2.15,-4.302 U1.109@2.15,-3.8
  Inner3 w0.079: v1(-5.158,-11.633) -5.158,-10.125 -5.232,-10.051 -5.232,-7.073 -4.473,-6.313 -4.473,-6.07 v1(-4.471,-6.068)
  Inner4 w0.078: v1(-4.471,-6.068) -4.461,-6.059 -3.878,-6.059 -3.467,-5.648 -2.05,-5.648 -1.794,-5.904 0.872,-5.904 1.419,-5.357 1.556,-5.357 1.748,-5.165 1.748,-4.893 v1(1.554,-4.699)
DDR_D7: U1.70 U2.F9 | length 23.8
  Top w0.092: v1(-7.123,-0.535) -7.116,-0.543 -6.607,-0.543 U1.70@-6.6,-0.55 ; U2.F9@0.508,-15.258 0.516,-15.258 0.838,-14.936 v1(0.838,-14.91)
  Inner3 w0.079: v1(0.673,-1.706) 0.72,-1.706 0.86,-1.846 0.932,-1.846 1.089,-2.003 1.089,-2.095 1.091,-2.097 1.091,-2.319 1.165,-2.393 1.165,-5.641 1.037,-5.768 1.037,-7.052 1.091,-7.106 1.091,-8.232 1.053,-8.271 1.053,-9.397 1.329,-9.673 1.329,-10.449 1.431,-10.552 1.431,-11.166 1.422,-11.175 1.422,-14.326 v1(0.838,-14.91)
  Inner4 w0.078: v1(-7.123,-0.535) -7.1,-0.559 -4.947,-0.559 -4.497,-0.109 -4.483,-0.109 -4.406,-0.032 -2.089,-0.032 -1.394,-0.728 -0.806,-0.728 -0.284,-1.249 0.34,-1.249 0.497,-1.407 0.497,-1.531 v1(0.673,-1.706)
DDR_D8: U1.66 U2.C8 | length 23.8
  Top w0.092: v1(-7.074,0.425) -7.061,0.438 -6.612,0.438 U1.66@-6.6,0.45 ; v1(2.54,-13.945) 2.571,-13.976 2.571,-14.171 U2.C8@2.9,-14.5
  Inner3 w0.079: v1(1.1,-1.121) 1.452,-1.473 1.556,-1.473 2.083,-2 2.083,-3.607 2.414,-3.938 2.414,-9.55 2.594,-9.73 2.594,-10.482 2.688,-10.576 2.688,-13.343 2.54,-13.491 v1(2.54,-13.945)
  Inner4 w0.078: v1(-7.074,0.425) -7.059,0.441 -4.708,0.441 -4.641,0.508 -0.775,0.508 -0.093,-0.174 -0.093,-0.39 0.203,-0.686 0.709,-0.686 1.1,-1.077 v1(1.1,-1.121)
DDR_D9: U1.112 U2.C2 | length 23.2
  Top w0.092: U2.C2@2.9,-9.7 2.938,-9.738 2.938,-10.042 3.349,-10.453 3.349,-10.645 3.753,-11.049 4.058,-11.049 v1(4.246,-10.861) ; U1.112@2.9,-2.92 2.9,-2.392 2.794,-2.286 2.697,-2.189 2.697,-1.894 2.784,-1.807 2.988,-1.807 3.075,-1.72 3.075,-1.547 2.988,-1.461 2.779,-1.461 2.693,-1.374 2.693,-1.201 2.779,-1.114 3.069,-1.114 3.156,-1.028 3.156,-0.855 3.069,-0.768 2.784,-0.768 2.697,-0.681 2.697,-0.508 2.697,-0.293 2.913,-0.076 3.157,-0.076 3.284,-0.203 v1(3.327,-0.203)
  Inner3 w0.079: v1(3.327,-0.203) 3.531,-0.406 3.531,-0.483 3.531,-0.522 3.614,-0.605 3.637,-0.605 3.72,-0.688 3.72,-0.855 3.637,-0.938 3.36,-0.938 3.277,-1.021 3.277,-1.188 3.36,-1.271 3.637,-1.271 3.72,-1.354 3.72,-1.52 3.637,-1.604 3.36,-1.604 3.277,-1.687 3.277,-1.853 3.36,-1.936 3.535,-1.936 3.618,-2.02 3.618,-2.186 3.535,-2.269 3.36,-2.269 3.277,-2.352 3.277,-2.519 3.36,-2.602 3.719,-2.602 3.759,-2.642 4.268,-3.151 4.268,-3.302 4.268,-3.674 4.185,-3.757 4.173,-3.757 4.09,-3.841 4.09,-4.007 4.173,-4.09 4.284,-4.09 4.367,-4.173 4.367,-4.34 4.284,-4.423 4.173,-4.423 4.09,-4.506 4.09,-4.673 4.173,-4.756 4.284,-4.756 4.367,-4.839 4.367,-5.005 4.284,-5.088 4.173,-5.088 4.09,-5.172 4.09,-5.338 4.173,-5.421 4.284,-5.421 4.367,-5.504 4.367,-5.671 4.284,-5.754 4.173,-5.754 4.09,-5.837 4.09,-6.004 4.173,-6.087 4.284,-6.087 4.367,-6.17 4.367,-6.336 4.284,-6.42 4.173,-6.42 4.09,-6.503 4.09,-6.669 4.173,-6.752 4.284,-6.752 4.367,-6.836 4.367,-7.002 4.284,-7.085 4.173,-7.085 4.09,-7.168 4.09,-7.335 4.173,-7.418 4.284,-7.418 4.367,-7.501 4.367,-7.668 4.284,-7.751 4.173,-7.751 4.09,-7.834 4.09,-8 4.173,-8.083 4.284,-8.083 4.367,-8.167 4.367,-8.333 4.284,-8.416 4.173,-8.416 4.09,-8.499 4.09,-8.666 4.173,-8.749 4.284,-8.749 4.367,-8.832 4.367,-8.999 4.284,-9.082 4.173,-9.082 4.09,-9.165 4.09,-9.331 4.173,-9.415 4.185,-9.415 4.268,-9.498 4.268,-9.944 ; v1(4.246,-10.861) 4.445,-10.662 4.445,-10.121 4.268,-9.944 ; 4.268,-9.954 4.268,-9.944 ; 4.273,-9.948 4.277,-9.948
DDR_D10: U1.68 U2.D7 | length 22.8
  Top w0.092: v1(-7.112,-0.051) -6.604,-0.05 U1.68@-6.592,-0.038 ; v1(1.812,-13.43) 1.821,-13.43 2.091,-13.7 U2.D7@2.1,-13.7
  Inner3 w0.079: v1(1.391,-1.963) 1.378,-1.976 1.378,-2.141 1.345,-2.174 1.345,-2.746 1.445,-2.846 1.445,-3.734 1.873,-4.162 1.873,-9.774 2.053,-9.955 2.053,-10.706 2.075,-10.728 2.147,-10.8 2.147,-11.43 2.147,-11.526 2.064,-11.61 1.977,-11.61 1.893,-11.693 1.893,-11.859 1.977,-11.942 2.064,-11.942 2.147,-12.026 2.147,-12.065 2.147,-12.385 1.812,-12.72 v1(1.812,-13.43)
  Inner4 w0.078: v1(-7.112,-0.051) -5.382,-0.051 -5.266,-0.166 -4.809,-0.166 -4.571,0.071 -4.569,0.071 -4.492,0.148 -1.427,0.148 -0.21,-1.069 0.414,-1.069 1.064,-1.718 1.154,-1.718 v1@1.395,-1.959
DDR_D11: U1.110 U2.D3 | length 23.7
  Top w0.092: U2.D3@2.116,-10.516 2.154,-10.554 2.154,-10.85 2.76,-11.455 2.794,-11.455 3.186,-11.455 3.273,-11.542 3.273,-11.623 3.36,-11.709 3.533,-11.709 3.619,-11.623 3.619,-11.491 3.706,-11.404 3.879,-11.404 3.966,-11.491 3.966,-11.623 4.052,-11.709 4.225,-11.709 4.312,-11.623 4.312,-11.542 4.399,-11.455 4.642,-11.455 4.94,-11.455 v1(5.124,-11.271) ; U1.110@2.4,-2.92 2.4,-2.298 2.499,-2.199 2.499,-1.121 2.503,-1.116 2.503,0.42 v1(2.921,0.838)
  Inner3 w0.079: v1(2.921,0.838) 2.704,0.621 2.704,-0.568 2.972,-0.836 2.972,-0.914 2.972,-1.109 2.889,-1.192 2.828,-1.192 2.744,-1.275 2.744,-1.442 2.828,-1.525 2.889,-1.525 2.972,-1.608 2.972,-2.68 3.187,-2.896 3.207,-2.915 3.234,-2.943 3.352,-2.943 3.414,-2.881 3.532,-2.881 3.649,-2.998 3.649,-3.116 3.587,-3.178 3.587,-3.296 3.598,-3.306 3.626,-3.334 3.909,-3.617 3.909,-6.946 3.829,-7.026 3.766,-7.089 3.766,-7.206 3.909,-7.349 3.909,-7.516 3.826,-7.599 3.707,-7.599 3.624,-7.682 3.624,-7.848 3.707,-7.931 3.826,-7.931 3.909,-8.015 3.909,-8.181 3.826,-8.264 3.707,-8.264 3.624,-8.347 3.624,-8.514 3.707,-8.597 3.826,-8.597 3.909,-8.68 3.909,-8.847 3.826,-8.93 3.815,-8.93 3.732,-9.013 3.732,-9.576 3.741,-9.584 3.741,-10.142 3.909,-10.31 3.909,-10.945 4.235,-11.271 v1(5.124,-11.271)
DDR_D12: U1.111 U2.D1 | length 21.9
  Top w0.092: v1(-5.891,-8.096) -5.883,-8.088 -5.883,-6.569 v1(-5.875,-6.561) ; v1(1.408,-7.994) 1.832,-8.417 1.832,-8.632 1.997,-8.797 U2.D1@2.041,-8.797 ; U1.111@2.65,-3.8 2.667,-3.817 2.667,-4.657 v1(2.683,-4.674)
  Inner4 w0.078: v1(-5.891,-8.096) -5.314,-7.518 -4.877,-7.518 ; v1(-5.875,-6.561) -5.105,-6.561 -4.734,-6.561 -4.651,-6.644 -4.651,-6.68 -4.568,-6.763 -4.401,-6.763 -4.318,-6.68 -4.318,-6.621 -4.235,-6.537 -4.069,-6.537 -3.986,-6.621 -3.986,-6.68 -3.903,-6.763 -3.737,-6.763 -3.654,-6.68 -3.654,-6.621 -3.57,-6.537 -3.404,-6.537 -3.321,-6.621 -3.321,-6.68 -3.238,-6.763 -3.072,-6.763 -2.989,-6.68 -2.989,-6.644 -2.906,-6.561 -2.515,-6.561 1.466,-6.561 2.637,-5.39 2.637,-4.807 2.65,-4.794 2.65,-4.707 v1(2.683,-4.674) ; -4.877,-7.526 -1.918,-7.526 -1.575,-7.869 -1.334,-7.869 -1.09,-7.625 0.989,-7.625 1.314,-7.95 1.317,-7.95 1.361,-7.994 v1(1.408,-7.994)
DDR_D13: U1.67 U2.D9 | length 22.8
  Top w0.092: U1.67@-5.72,0.2 v1@-5.204,0.2 ; v1(1.753,-14.961) 1.761,-14.961 U2.D9@2.1,-15.3
  Inner3 w0.079: v1(1.625,-2.263) 1.647,-2.285 1.647,-2.477 1.715,-2.545 1.715,-3.749 2.053,-4.087 2.053,-9.7 2.234,-9.88 2.234,-10.631 2.255,-10.653 2.328,-10.726 2.328,-12.46 2.08,-12.707 2.08,-13.528 2.222,-13.67 2.222,-14.491 v1(1.753,-14.961)
  Inner4 w0.078: v1(-5.131,0.102) -5.084,0.102 -4.934,0.251 -4.643,0.251 -4.566,0.328 -0.849,0.328 -0.332,-0.189 -0.332,-0.481 0.076,-0.889 0.489,-0.889 1.1,-1.5 1.432,-1.5 1.659,-1.727 1.659,-2.23 v1(1.625,-2.263)
DDR_D14: U1.114 U2.B1 | length 23.4
  Top w0.092: v1(2.972,-0.406) 3.016,-0.406 3.177,-0.568 3.304,-0.568 3.4,-0.664 3.4,-0.838 3.4,-0.884 3.487,-0.971 3.567,-0.971 3.654,-1.058 3.654,-1.231 3.567,-1.317 3.355,-1.317 3.269,-1.404 3.269,-1.577 3.355,-1.664 3.567,-1.664 3.654,-1.75 3.654,-1.923 3.567,-2.01 3.487,-2.01 3.4,-2.096 3.4,-2.515 U1.114@3.4,-2.92 ; U2.B1@3.7,-8.9 4.122,-9.322 v1(4.978,-9.322)
  Inner3 w0.079: v1(2.972,-0.406) 2.99,-0.388 2.99,-0.161 3.232,0.081 3.63,0.081 3.775,-0.065 4.307,-0.065 4.597,-0.356 4.597,-0.457 4.597,-0.497 4.681,-0.58 4.768,-0.58 4.851,-0.663 4.851,-0.829 4.768,-0.913 4.427,-0.913 4.343,-0.996 4.343,-1.162 4.427,-1.245 4.768,-1.245 4.851,-1.329 4.851,-1.495 4.768,-1.578 4.427,-1.578 4.343,-1.661 4.343,-1.828 4.427,-1.911 4.768,-1.911 4.851,-1.994 4.851,-2.16 4.768,-2.244 4.427,-2.244 4.343,-2.327 4.343,-2.493 4.427,-2.576 4.768,-2.576 4.851,-2.66 4.851,-2.826 4.768,-2.909 4.618,-2.909 4.535,-2.992 4.535,-3.159 4.618,-3.242 4.768,-3.242 4.851,-3.325 4.851,-3.492 4.768,-3.575 4.681,-3.575 4.597,-3.658 4.597,-3.785 4.597,-3.835 4.978,-4.216 4.978,-4.394 4.978,-4.637 4.895,-4.721 4.833,-4.721 4.75,-4.804 4.75,-4.97 4.833,-5.053 5.059,-5.053 5.142,-5.137 5.142,-5.303 5.059,-5.386 4.833,-5.386 4.75,-5.469 4.75,-5.636 4.833,-5.719 5.074,-5.719 5.157,-5.802 5.157,-5.969 5.074,-6.052 4.833,-6.052 4.75,-6.135 4.75,-6.301 4.833,-6.385 5.081,-6.385 5.165,-6.468 5.165,-6.634 5.081,-6.717 4.833,-6.717 4.75,-6.801 4.75,-6.967 4.833,-7.05 5.081,-7.05 5.165,-7.133 5.165,-7.3 5.081,-7.383 4.833,-7.383 4.75,-7.466 4.75,-7.632 4.833,-7.716 5.081,-7.716 5.165,-7.799 5.165,-7.965 5.081,-8.048 4.833,-8.048 4.75,-8.132 4.75,-8.298 4.833,-8.381 4.997,-8.381 5.08,-8.464 5.08,-8.631 4.997,-8.714 4.833,-8.714 4.75,-8.797 4.75,-8.964 4.833,-9.047 4.895,-9.047 4.978,-9.13 4.978,-9.169 v1(4.978,-9.322)
DDR_D15: U1.65 U2.B9 | length 24.1
  Top w0.092: U1.65@-5.72,0.7 -5.716,0.704 -5.138,0.704 v1@-5.131,0.711 ; v1(3.353,-14.986) 3.369,-14.986 3.683,-15.3 U2.B9@3.7,-15.3
  Inner3 w0.079: v1(1.5,-1.109) 1.5,-1.143 2.263,-1.906 2.263,-2.846 2.738,-3.321 2.738,-4.324 2.952,-4.537 2.952,-4.85 2.594,-5.207 2.594,-9.475 2.839,-9.72 2.839,-10.472 3,-10.633 3,-11.064 3.368,-11.432 3.368,-11.674 3.504,-11.809 3.504,-12.094 3.581,-12.171 3.581,-14.757 v1(3.353,-14.986)
  Inner4 w0.078: v1@-5.131,0.711 -5.117,0.725 -3.5,0.725 -3.429,0.796 -0.059,0.796 0.832,-0.095 0.832,-0.411 0.989,-0.568 1.33,-0.568 1.5,-0.738 v1(1.5,-1.109)
  other v1: -5.131,0.708
DDR_LDM: U1.108 U2.F3 | length 23.5
  Top w0.092: U2.F3@0.5,-10.5 0.852,-10.852 0.966,-10.852 1.413,-11.3 1.413,-11.505 1.908,-11.999 4.369,-11.999 4.582,-11.786 v1(5.232,-11.786) ; U1.108@1.9,-2.92 1.9,-1.58 2.224,-1.256 v1(2.224,-1.233)
  Inner3 w0.079: v1(2.224,-1.233) 2.224,-1.26 2.791,-1.827 2.791,-2.755 3.051,-3.014 3.202,-3.165 3.353,-3.316 3.353,-3.429 3.353,-3.468 3.436,-3.552 3.505,-3.552 3.588,-3.635 3.588,-3.801 3.505,-3.884 3.182,-3.884 3.099,-3.968 3.099,-4.134 3.182,-4.217 3.27,-4.217 3.353,-4.3 3.353,-4.521 3.353,-4.547 3.353,-5.252 3.436,-5.335 3.646,-5.335 3.729,-5.418 3.729,-5.584 3.646,-5.668 3.219,-5.668 3.135,-5.751 3.135,-5.917 3.219,-6 3.646,-6 3.729,-6.084 3.729,-6.25 3.646,-6.333 3.219,-6.333 3.135,-6.416 3.135,-6.583 3.219,-6.666 3.527,-6.666 3.61,-6.749 3.61,-6.915 3.527,-6.999 3.219,-6.999 3.135,-7.082 3.135,-7.248 3.219,-7.331 3.362,-7.331 3.445,-7.415 3.445,-7.581 3.362,-7.664 3.219,-7.664 3.135,-7.747 3.135,-7.914 3.219,-7.997 3.27,-7.997 3.353,-8.08 3.353,-8.447 3.363,-8.457 3.363,-8.508 3.552,-8.696 3.552,-9.246 3.552,-9.88 3.56,-9.888 3.56,-10.216 3.729,-10.385 3.729,-11.332 4.183,-11.786 v1(5.232,-11.786)
DDR_LDQS: U1.113 U2.F7 | length 22.5
  Top w0.092: v1(0.203,-13.31) 0.203,-13.353 0.508,-13.658 U2.F7@0.508,-13.665 ; v1(2.904,-5.276) 2.904,-5.256 3.36,-4.801 3.36,-4.534 3.15,-4.325 U1.113@3.15,-3.8
  Inner3 w0.079: v1(2.904,-5.276) 2.871,-5.309 2.871,-5.505 2.775,-5.601 2.775,-8.063 2.824,-8.113 2.824,-9.45 3.02,-9.646 3.02,-10.22 3.548,-10.748 3.548,-11.524 3.632,-11.608 3.66,-11.636 3.746,-11.722 3.746,-11.839 3.684,-11.901 3.684,-12.019 3.802,-12.136 3.919,-12.136 4.048,-12.008 4.165,-12.008 4.283,-12.126 4.283,-12.243 4.155,-12.372 4.155,-12.489 4.272,-12.607 4.39,-12.607 4.452,-12.545 4.57,-12.545 4.597,-12.573 4.775,-12.751 4.982,-12.751 5.109,-12.624 v1(5.156,-12.624)
  Inner4 w0.078: v1(0.203,-13.31) 0.209,-13.304 0.209,-13.127 0.474,-12.862 0.711,-12.625 0.94,-12.625 ; 0.94,-12.624 1.083,-12.624 1.166,-12.707 1.166,-13.011 1.249,-13.094 1.415,-13.094 1.498,-13.011 1.498,-12.707 1.581,-12.624 1.748,-12.624 1.831,-12.707 1.831,-13.011 1.914,-13.094 2.08,-13.094 2.163,-13.011 2.163,-12.591 2.246,-12.507 2.412,-12.507 2.495,-12.591 2.495,-12.989 2.579,-13.073 2.745,-13.073 2.828,-12.989 2.828,-12.453 2.911,-12.37 3.077,-12.37 3.16,-12.453 3.16,-13.011 3.243,-13.094 3.41,-13.094 3.493,-13.011 3.493,-12.453 3.576,-12.37 3.742,-12.37 3.825,-12.453 3.825,-13.011 3.908,-13.094 4.074,-13.094 4.157,-13.011 4.157,-12.453 4.241,-12.37 4.407,-12.37 4.49,-12.453 4.49,-12.541 4.573,-12.624 4.902,-12.624 v1(5.156,-12.624)
DDR_ODT: U1.74 U2.K9 | length 22.4
  Top w0.092: v1(-7.214,-1.93) -7.214,-1.676 -7.087,-1.55 U1.74@-6.6,-1.55 ; v1(-2.692,-15.773) -2.696,-15.77 -2.696,-15.269 U2.K9@-2.692,-15.265
  Inner3 w0.079: v1(-8.504,-14.478) -8.504,-12.287 -8.009,-11.792 -8.009,-8.644 -7.376,-8.011 -7.376,-6.327 -7.341,-6.291 -7.341,-4.268 -7.157,-4.085 -7.117,-4.045 -7.117,-3.928 -7.201,-3.844 -7.257,-3.844 -7.341,-3.761 -7.341,-3.595 -7.257,-3.512 -7.054,-3.512 -6.971,-3.428 -6.971,-3.262 -7.054,-3.179 -7.265,-3.179 -7.348,-3.096 -7.348,-2.929 -7.265,-2.846 -7.054,-2.846 -6.971,-2.763 -6.971,-2.283 -6.971,-2.173 -7.074,-2.07 v1(-7.214,-1.93)
  Inner4 w0.078: v1(-8.504,-14.478) -7.728,-15.254 -6.582,-15.254 -6.36,-15.032 -5.214,-15.032 -4.396,-15.85 -3.672,-15.85 -3.328,-15.506 -2.96,-15.506 v1(-2.692,-15.773)